# EAGLE board mainBoard_new (EAGLE 9.6.2)
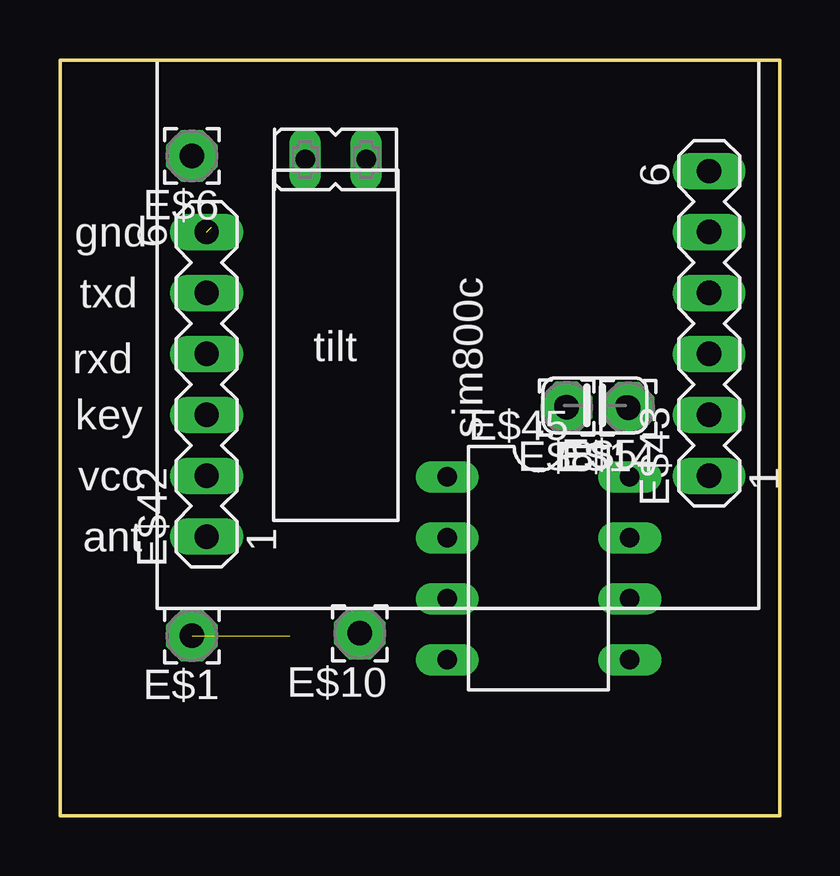
[diagram p0: board, top side]
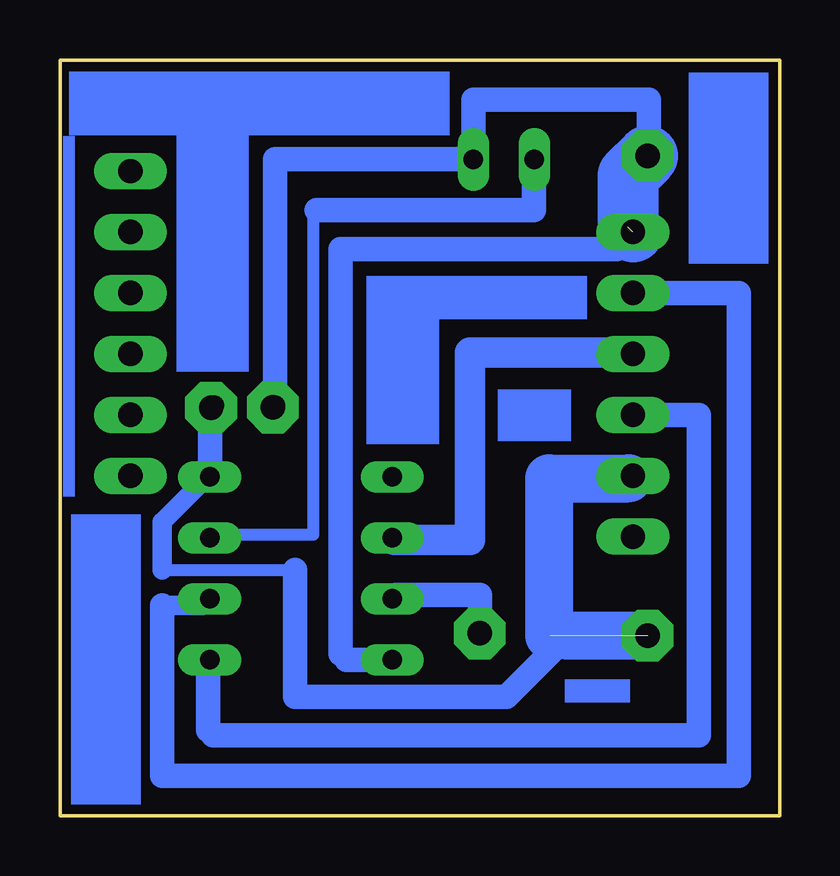
[diagram p1: board, bottom side, seen from below]

Size 30 x 31.5 mm. Coordinates in mm from the lower left corner, seen from the top.
Outline: 0,31.5 30,31.5 30,0 0,0 0,31.5
Copper layers (1*16): Top 0.035mm / dielectric 1.5mm / Bottom 0.035mm
Design rules "default *": minimum track width 20mil, minimum drill 24mil, track to track 15mil, track to pad 10mil, pad to pad 8mil, via to via 8mil, smd to smd 8mil, copper to edge 40mil, drill to drill 8mil, minimum pad ring 10mil, minimum via ring 8mil, stop-mask expansion 4mil, vias tented up to drill 0mil, thermal gap 10mil

## Footprints (pad centres in the part's own frame; a part is rotated, then mirrored left to right if it is on the bottom)
2,15/1,0 = drill 1.016 pad 2.159 octagon: 1 0,0
C025-024X044 = drill 0.813 octagon: 1 -1.27,0; 2 1.27,0
FE02-1 = drill 0.813 long: 1 -1.27,0; 2 1.27,0
MA06-1 = drill 1.016 long: 1 -6.35,0; 2 -3.81,0; 3 -1.27,0; 4 1.27,0; 5 3.81,0; 6 6.35,0
DIL08 = drill 0.813 long: 1 -3.81,-3.81; 2 -1.27,-3.81; 3 1.27,-3.81; 4 3.81,-3.81; 5 3.81,3.81; 6 1.27,3.81; 7 -1.27,3.81; 8 -3.81,3.81

## Placement (x,y rotation side)
E$1  [2,15/1,0]  5.5,7.5 180 top
E$5  [C025-024X044]  22.3,17.1 180 top
E$6  [2,15/1,0]  5.5,27.5 180 top
E$8  [2,15/1,0]  21.12,17.01 180 top
E$10  [2,15/1,0]  12.5,7.6 180 top
E$11  [FE02-1]  11.49,27.36 180 top
E$14  [2,15/1,0]  23.7,17 180 top
E$42  [MA06-1]  6.11,17.98 90 top
E$43  [MA06-1]  27.07,20.52 90 top
E$45  [DIL08]  19.95,10.31 270 top

## Library data of the parts
E$1 E$6 E$8 E$10 E$14 = wirepad
E$5 = rcl
E$11 = con-lsta2
E$42 E$43 = con-lstb
E$45 = 74xx-us

## Nets
S$2: E$42.3 E$45.5
S$3: E$42.4 E$45.2
S$4: E$10.1 E$45.3
S$5: E$42.5 E$45.6
S$9: E$11.2 E$45.7
S$14: E$5.2 E$6.1 E$11.1 E$42.6 E$45.4
S$15: E$1.1 E$5.1 E$42.2 E$45.8

## Tracks (layer width: path | path; a pad name or v marks a point on that pad's centre or on a via)
S$2
  Bottom 0.508: 23.82,3.55 23.61,3.34
  Bottom 1.016: E$45.5 23.82,6.44 23.82,3.55 | 23.61,3.34 3.37,3.34 3.37,16.71 E$42.3
S$3
  Bottom 0.508: E$45.2 16.06,11.5
  Bottom 1.27: E$42.4 6.16,19.29 12.91,19.29 12.91,11.5 16.06,11.5
S$4
  Bottom 0.508: E$45.3 15.98,9.2
  Bottom 1.016: 15.98,9.2 12.5,9.2 E$10.1
S$5
  Bottom 0.813: 25.75,8.76 24.04,8.76 E$45.6
  Bottom 1.016: 25.75,8.76 25.75,1.65 1.7,1.65 1.7,21.79 E$42.5
S$9
  Bottom 0.508: 19.29,25.25 19.45,25.1 19.45,11.7 23.9,11.7 23.75,11.75 E$45.7 | 10.25,27.25 E$11.2
  Bottom 1.016: 19.29,25.25 10.25,25.25 10.25,27.25
S$14  (1 unrouted)
  Bottom 0.508: 18.3,6.75 18.05,6.5 | 6.15,24.36 6.77,23.61 | E$6.1 5.45,27.55
  Bottom 1.016: E$5.2 21.03,27.36 E$11.1 12.77,29.85 5.45,29.85 5.45,27.55 | 6.77,23.61 18.3,23.61 18.3,6.75 | 18.05,6.5 E$45.4
  Bottom 2.54: 6.31,24.53 6.31,26.69 E$6.1 | E$42.6 6.15,24.36
S$15  (1 unrouted)
  Bottom 0.508: E$42.2 6.25,14.25 6.3,14.06 | 23.75,17 E$5.1 | 23.75,14.25 E$45.8 24,14 | 25.75,10.25 20.2,10.25
  Bottom 0.813: 25.75,10.25 25.75,12.25 24,14
  Bottom 1.016: 23.75,14.25 23.75,17 | 8.85,7.5 11.4,4.95 20.2,4.95 20.2,10.25
  Bottom 2: E$1.1 8.85,7.5 | 9.6,7.5 9.6,14.06 6.3,14.06
(copper drawn outside any net)
  shapes: Bottom area x9

## Text on the board
tPlace: gnd | txd | sim800c | tilt | rxd | key | vcc | ant